# Altium PCB Doublewide.PcbDoc (part 1 of 2)
Units mm, origin at the board's own origin, x right, y up, seen from the top; angles counter-clockwise.
Board outline 97.5 x 70 mm, 6 copper layers (Top (GND), L2-HS, L3-GND, L4-PWR, L5, Bot), stack 1.744 mm thick; 113 components, 172 nets, 522 pads, 114 vias.
Unrouted connection lines stored in the file: 204.
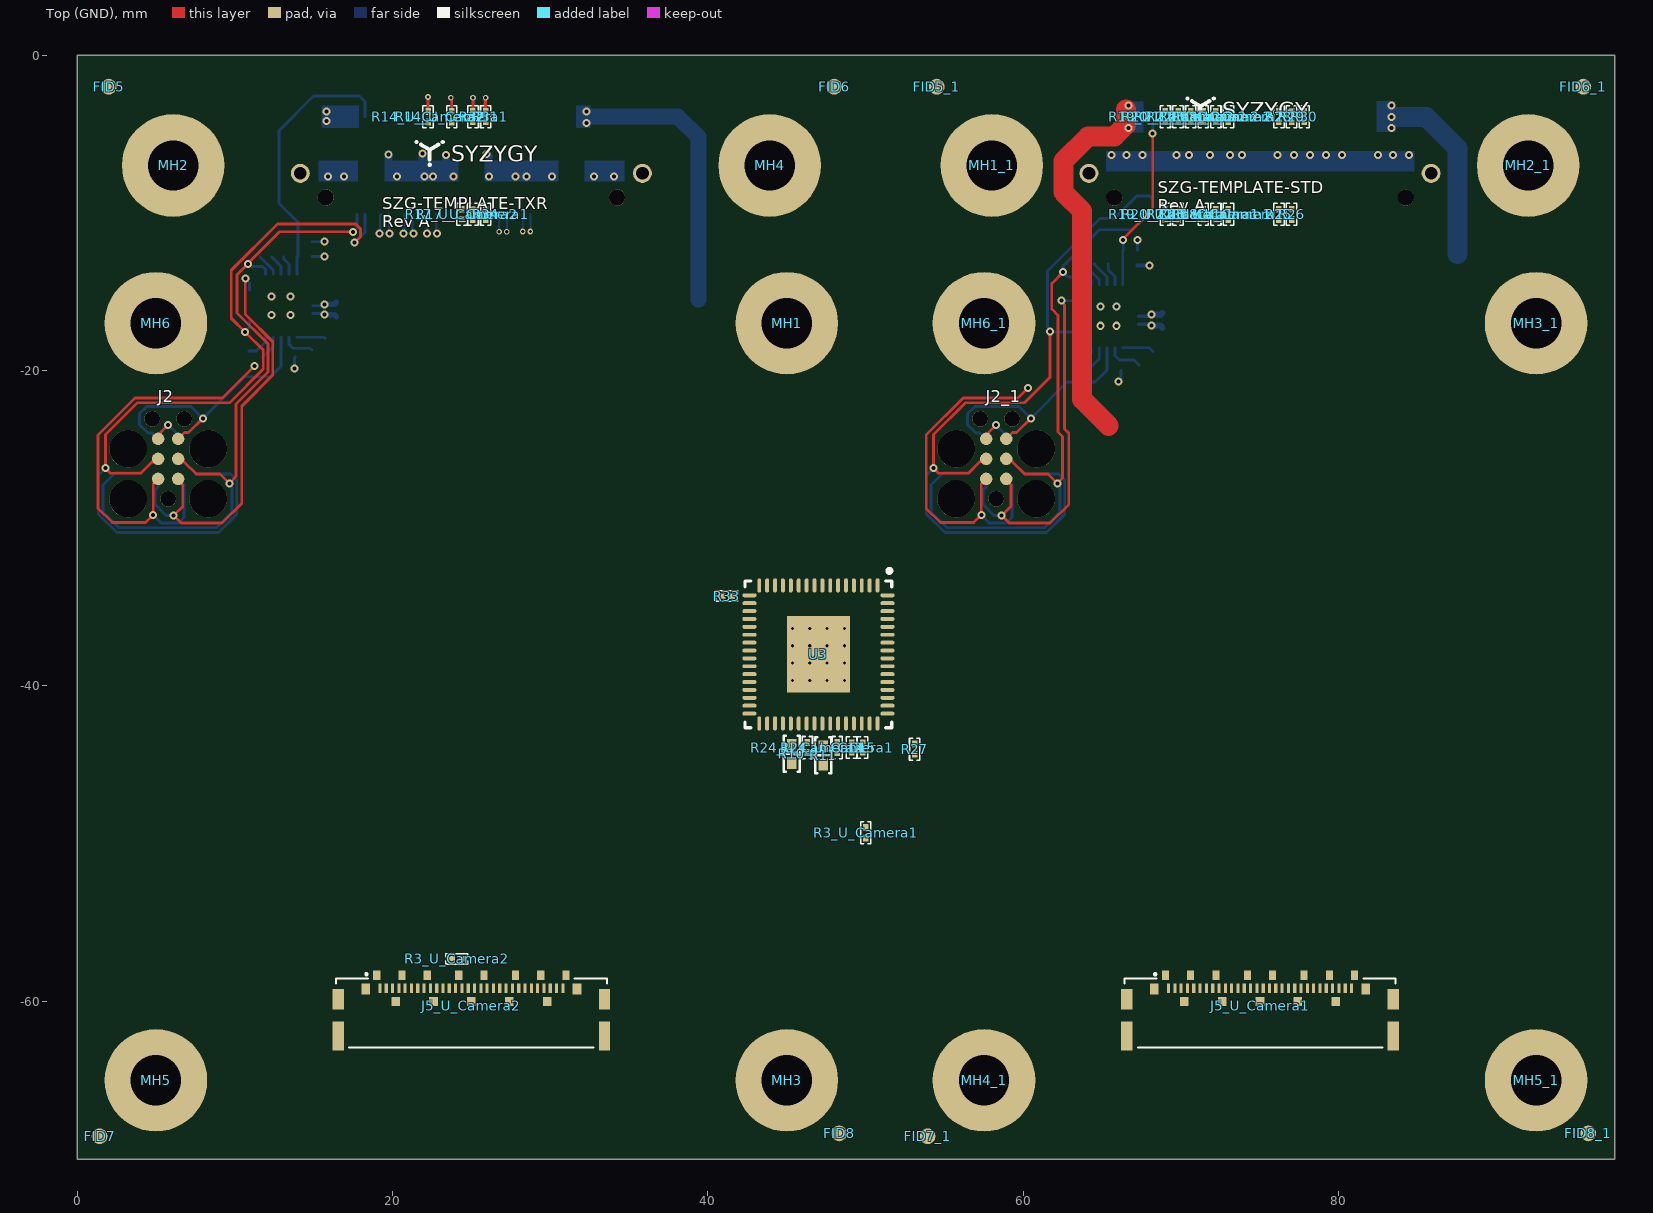
[diagram p0: Top (GND) view]
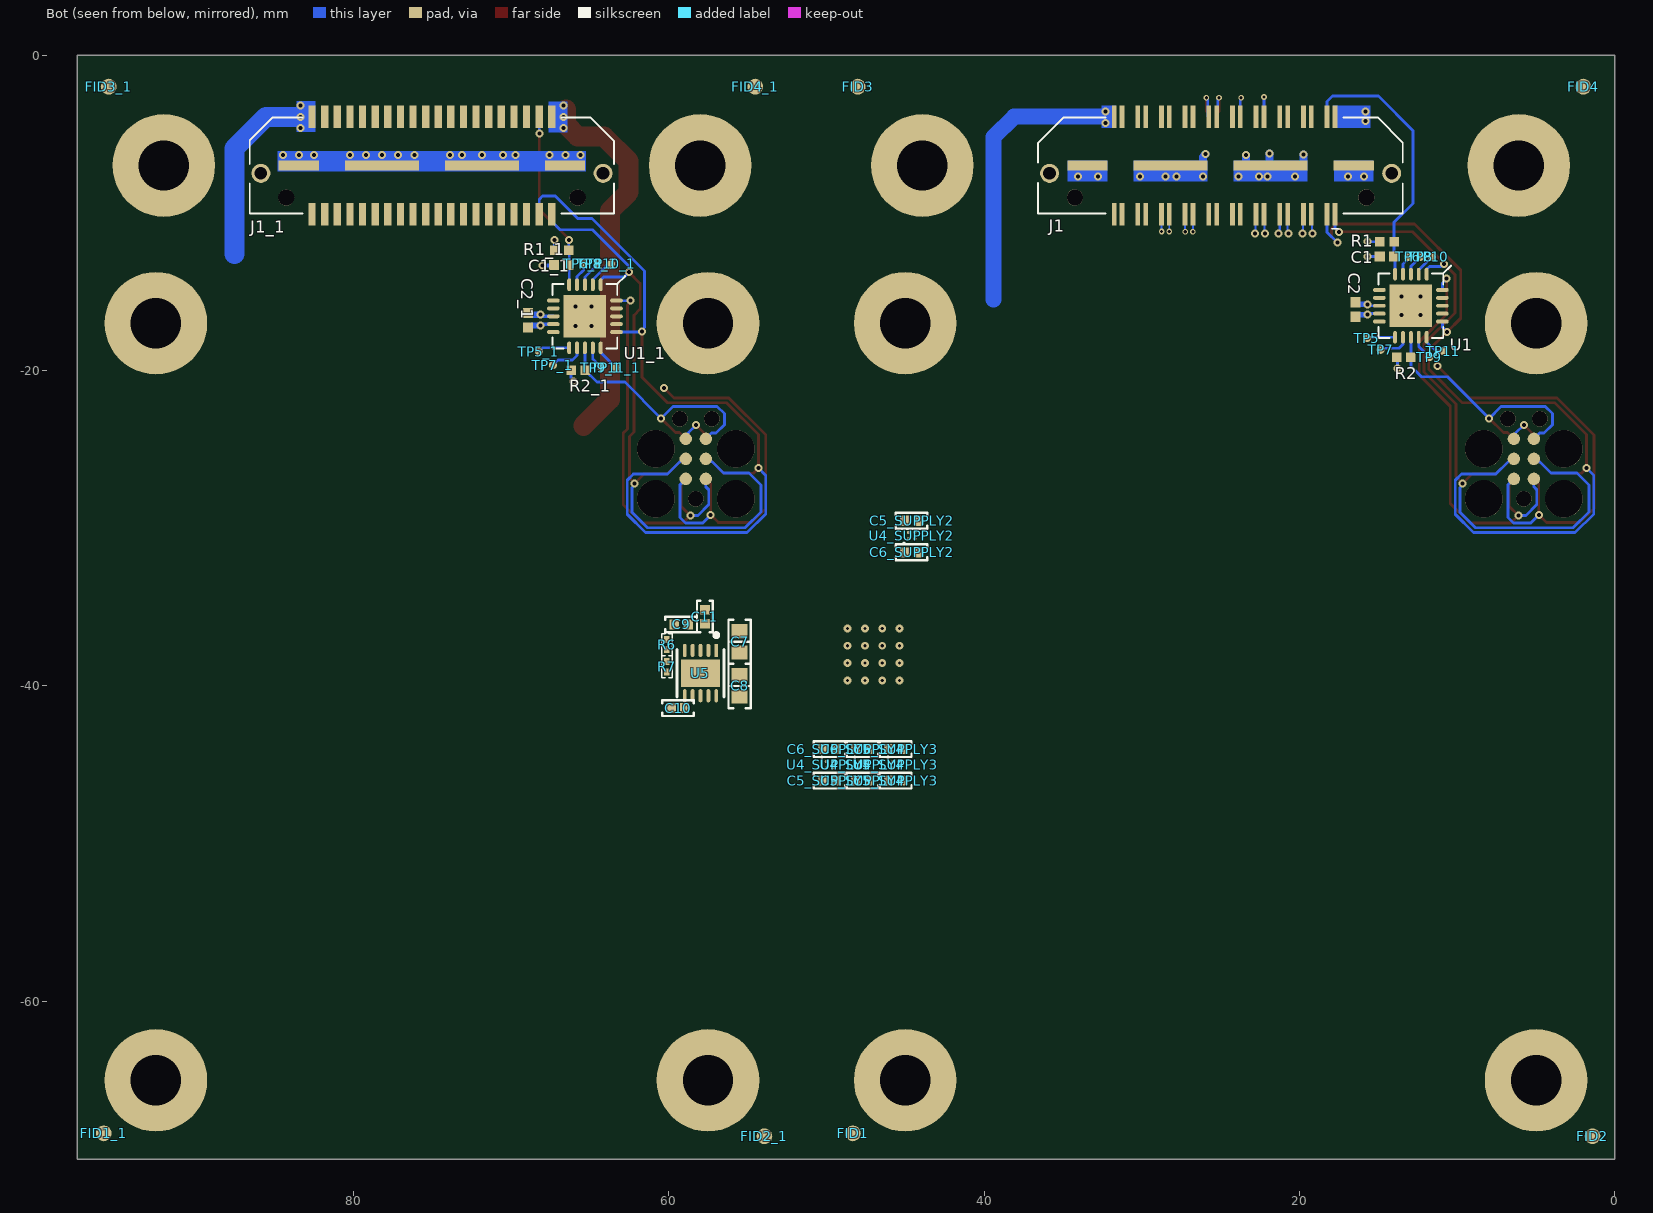
[diagram p1: Bot view, seen from below]
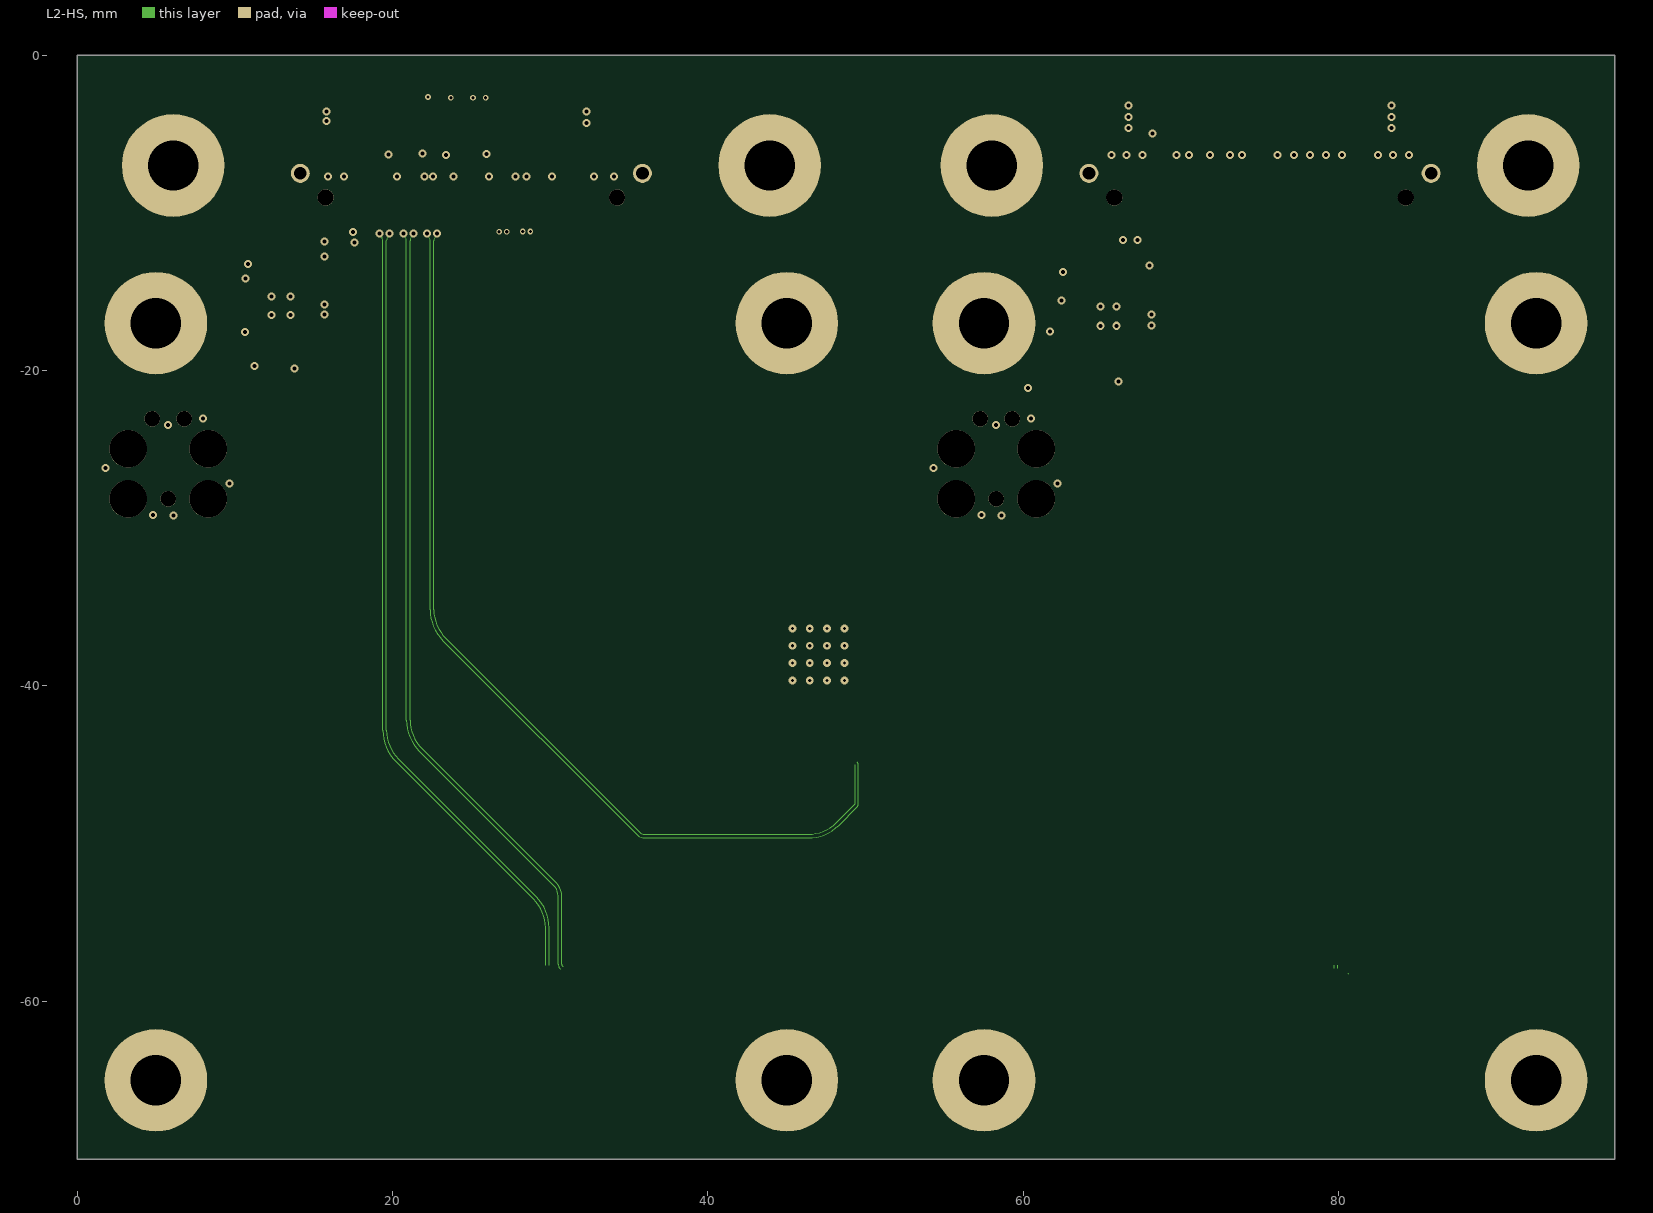
[diagram p2: L2-HS]
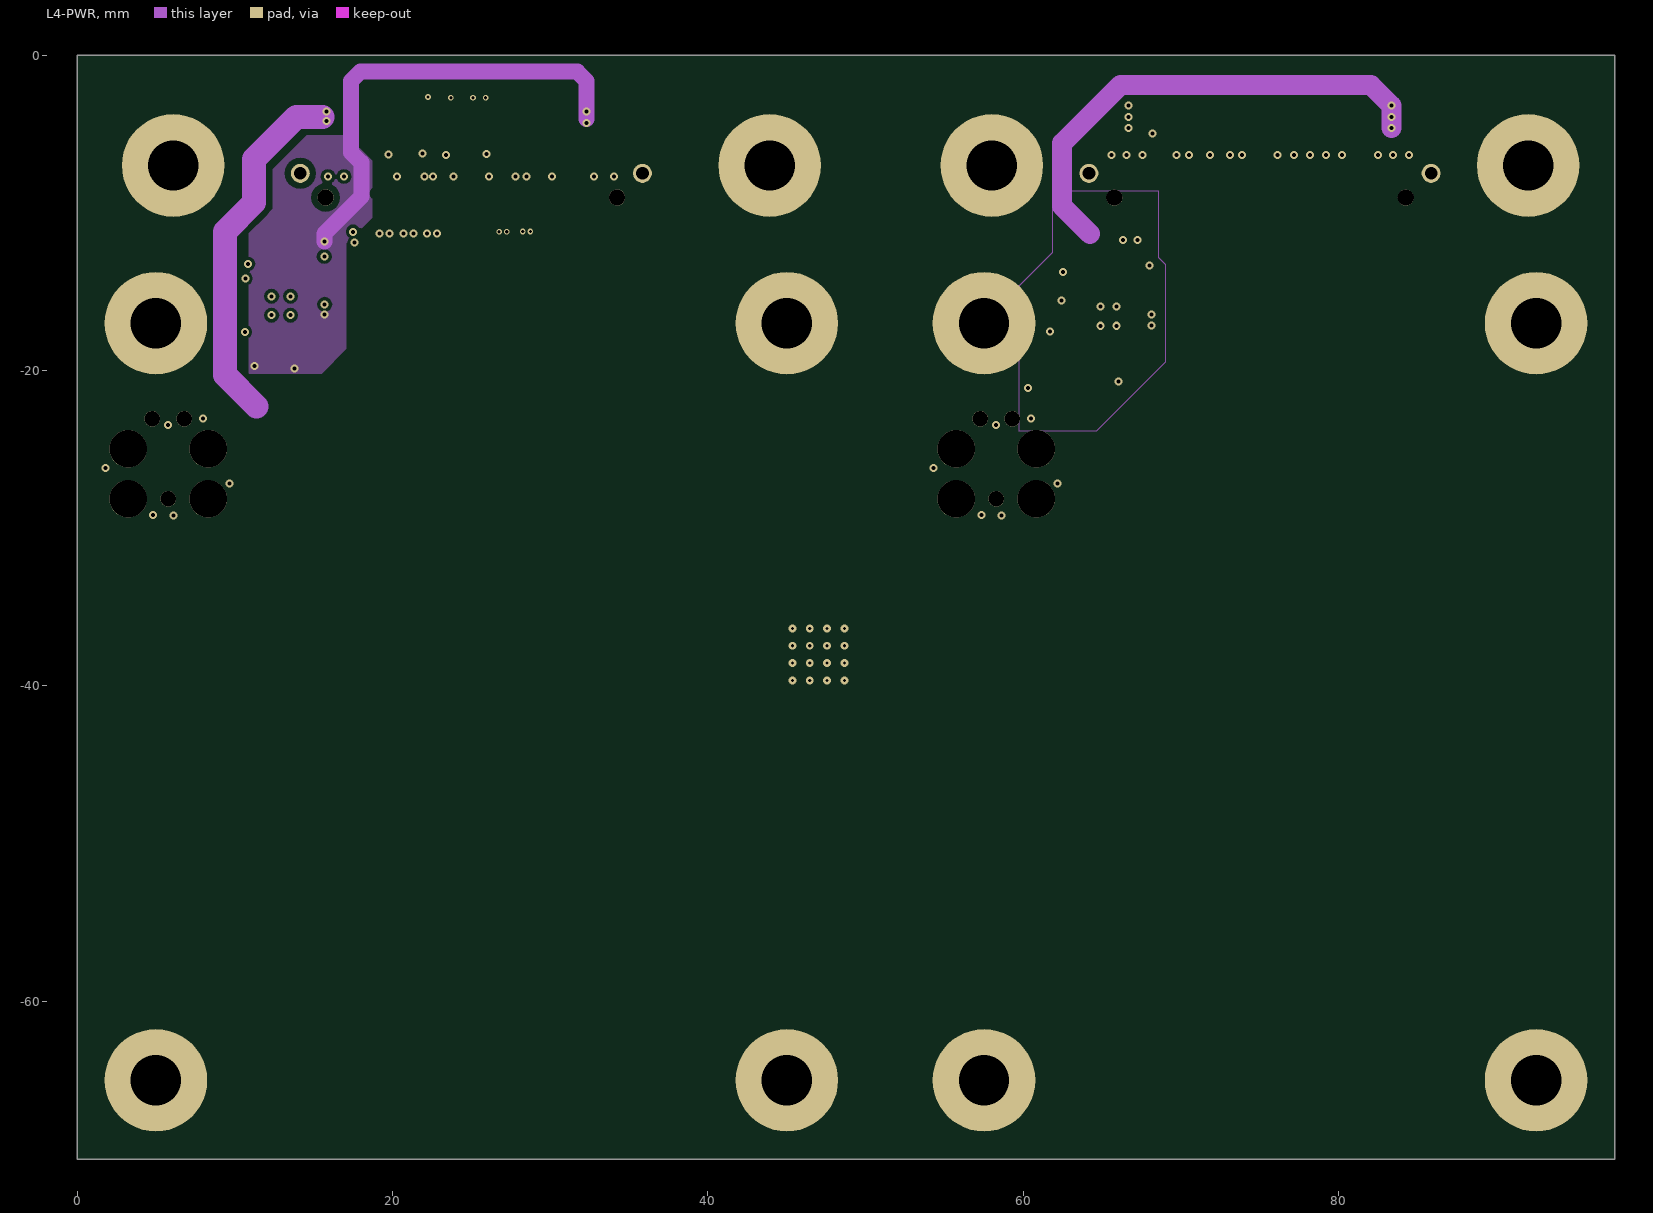
[diagram p3: L4-PWR]

## Layer stack, top to bottom
Top Solder: solder mask 0.02, Solder Resist, Dk 3.9
Top (GND): signal copper 0.035
Dielectric1-2: prepreg 0.112, IT180A, Dk 4.5
L2-HS: signal copper 0.015
Dielectric 1: prepreg 0.13, PP-006, Dk 4.9
L3-GND: signal copper 0.015
Dielectric2-3: core 1.13, IT180A, Dk 4.2
L4-PWR: signal copper 0.015
Dielectric3-4: prepreg 0.13, IT180A, Dk 4.9
L5: signal copper 0.015
Dielectric 2: prepreg 0.112, PP-006, Dk 4.5
Bot: signal copper 0.035
Bottom Solder: solder mask 0.02, Solder Resist, Dk 3.9

## Board outline
0,-70 97.5,-70 97.5,0 0,0

## Design rules (kind name [scope] priority, off if disabled: settings)
AssemblyTestPointUsage [All] p1 off:
AssemblyTestpoint [All] p1 off: testpointundercomponent=TRUE minsize=1.016 maxsize=2.54 preferedsize=1.524 minholesize=0 maxholesize=1.016 preferedholesize=0.813 testpointgrid=0.025 usegrid=TRUE gridtolerance=0 allowsidetop=TRUE allowsidebottom=TRUE
Clearance ClearanceFiducial [Name Like 'FID*'] p1: gap=1.27 ignorepadtopadclearanceinfootprint=FALSE except(0: Arc-Hole Track-Hole SMDPad-Hole THPad-Hole Via-Hole Fill-Hole Poly-Hole Region-Hole Text-Hole) // Fiducial clearance.
Clearance [All] p2: gap=0.127 ignorepadtopadclearanceinfootprint=FALSE except(0.203: Via-Fill Via-Poly Via-Region; 0.305: Poly-Region Region-Region; 0.381: Arc-Poly Track-Poly SMDPad-Poly THPad-Poly Fill-Poly Poly-Poly)
ComponentClearance [All] p1 off: gap=0.254 collisioncheckmode=3 verticalgap=0.254 showdistances=FALSE
DiffPairsRouting okDiffRouting100ohm [All] p1: maxlimit=0.16 minlimit=0.102 mostfreqgap=0.16 toplayer_mingap=0.16 toplayer_minwidth=0.119 toplayer_maxwidth=0.119 toplayer_prefwidth=0.119 midlayer2_mingap=0.16 midlayer2_minwidth=0.073 midlayer2_maxwidth=0.073 midlayer2_prefwidth=0.073 midlayer3_mingap=0.16 midlayer3_minwidth=0.072 midlayer3_maxwidth=0.072 midlayer3_prefwidth=0.072 bottomlayer_mingap=0.16 bottomlayer_minwidth=0.119 bottomlayer_maxwidth=0.119 bottomlayer_prefwidth=0.119 impedanceprofiledriven=TRUE impedanceprofileid={F71D47C0-FE2C-4818-BB52-536F50FC91E1} impedanceprofilevalue=100.000000 maxuncoupledlength=12.7 // Differential pair spacing for all 100ohm diff routes based on Gorilla Stackup.
FabricationTestPointUsage TestPointUsage [All] p1 off: valid=0 allowmultiple=FALSE
FabricationTestpoint Testpoint [All] p1: side=3 testpointundercomponent=TRUE minsize=0.508 maxsize=2.54 preferedsize=1.524 minholesize=0 maxholesize=1.016 preferedholesize=0.813 testpointgrid=0.025 allowsidetop=TRUE allowsidebottom=TRUE usegrid=TRUE gridtolerance=0.013
HoleSize [All] p1: absolutevalues=TRUE maxlimit=3.81 minlimit=0.254 maxpercent=80.000 minpercent=20.000
MatchedLengths Matched_SFP_DiffPair [InxSignalClass('xSignals_SFP')] p1: tolerance=0.254 checknetsindiffpair=TRUE checkdiffpairvsdiffpair=FALSE checkxsignals=FALSE checkothers=FALSE
MatchedLengths Matched_SFP1 [InxSignalClass('xSignals_SFP1')] p2: tolerance=4.699 checknetsindiffpair=FALSE checkdiffpairvsdiffpair=TRUE checkxsignals=TRUE checkothers=TRUE
MatchedLengths Matched_SFP2 [InxSignalClass('xSignals_SFP2')] p3: tolerance=4.699 checknetsindiffpair=FALSE checkdiffpairvsdiffpair=TRUE checkxsignals=TRUE checkothers=TRUE
MaximumViaCount okMaxViaDDR2Odt [InNetClass('okDDR2Data') Or InNetClass('okDDR2Masks') Or InNetClass('okDDR2Strobes')] p1: limit=2 // Set max via count of 2 for signals without external termination.
MaximumViaCount okMaxViaDDR2ExtTerm [InNetClass('okDDR2AddrCtrl') Or InNet('DRAM_C\K\') Or InNet('DRAM_CK')] p2: limit=3 // Set max via count of 3 for signals with external termination.
MinimumSolderMaskSliver [All] p1: minsoldermaskwidth=0.076
PlaneClearance [All] p1: clearance=0.279
PlaneConnect PlaneConnectNotVia [Not IsVia] p1: planeconnectstyle=Relief reliefexpansion=0.508 reliefentries=4 reliefconductorwidth=0.254 reliefairgap=0.254
PlaneConnect PlaneConnectVia [IsVia] p2: planeconnectstyle=Direct reliefexpansion=0.508 reliefentries=4 reliefconductorwidth=0.254 reliefairgap=0.254
PolygonConnect PolygonConnectVia [IsVia] p1: connectstyle=Direct reliefconductorwidth=0.203 reliefentries=4 polygonreliefangle="90 Angle" airgapwidth=0.254
PolygonConnect PolygonConnectNotVia [Not IsVia] p2: connectstyle=Relief reliefconductorwidth=0.254 reliefentries=4 polygonreliefangle="90 Angle" airgapwidth=0.254
RoomDefinition SUPPLY5 [InComponentClass('SUPPLY5')] p1: confinementstyle=ConfineIn formatcopy=TRUE lockcomponents=FALSE outline 48.46,-46.84 51.16,-46.84 51.16,-43.04 48.46,-43.04
RoomDefinition SUPPLY4 [InComponentClass('SUPPLY4')] p2: confinementstyle=ConfineIn formatcopy=TRUE lockcomponents=FALSE outline 46.36,-46.84 49.06,-46.84 49.06,-43.04 46.36,-43.04
RoomDefinition SUPPLY3 [InComponentClass('SUPPLY3')] p3: confinementstyle=ConfineIn formatcopy=TRUE lockcomponents=FALSE outline 44.26,-46.84 46.96,-46.84 46.96,-43.04 44.26,-43.04
RoomDefinition U_Clocking [InComponentClass('U_Clocking')] p4: confinementstyle=ConfineIn formatcopy=TRUE lockcomponents=FALSE outline -42.8,-143.2 8,-143.2 8,-117.8 -42.8,-117.8
RoomDefinition U_Camera2 [InComponentClass('U_Camera2')] p5: confinementstyle=ConfineIn formatcopy=TRUE lockcomponents=FALSE outline -42.8,-143.2 8,-143.2 8,-117.8 -42.8,-117.8
RoomDefinition U_Camera1 [InComponentClass('U_Camera1')] p6: confinementstyle=ConfineIn formatcopy=TRUE lockcomponents=FALSE outline -42.8,-143.2 8,-143.2 8,-117.8 -42.8,-117.8
RoomDefinition TXR [InComponentClass('TXR')] p7: confinementstyle=ConfineIn formatcopy=TRUE lockcomponents=FALSE outline -42.8,-143.2 8,-143.2 8,-117.8 -42.8,-117.8
RoomDefinition STD [InComponentClass('STD')] p8: confinementstyle=ConfineIn formatcopy=TRUE lockcomponents=FALSE outline -42.8,-143.2 8,-143.2 8,-117.8 -42.8,-117.8
RoomDefinition Main [InComponentClass('Main')] p9: confinementstyle=ConfineIn formatcopy=TRUE lockcomponents=FALSE outline -42.8,-143.2 8,-143.2 8,-117.8 -42.8,-117.8
RoomDefinition SUPPLY2 [InComponentClass('SUPPLY2')] p10: confinementstyle=ConfineIn formatcopy=TRUE lockcomponents=FALSE outline 45.931,-28.625 43.231,-28.625 43.231,-32.425 45.931,-32.425
RoomDefinition SUPPLY1 [InComponentClass('SUPPLY1')] p11: confinementstyle=ConfineIn formatcopy=TRUE lockcomponents=FALSE outline 60.8,-42.3 60.8,-34.2 54.4,-34.2 54.4,-42.3
RoutingVias [All] p1: holewidth=0.203 width=0.356 viastyle="Through Hole" minholewidth=0.203 minwidth=0.356 maxholewidth=1.016 maxwidth=1.524
SilkToSilkClearance [All] p1: silktosilkclearance=0.003
SilkToSolderMaskClearance SilkscreenOverComponentPads [IsPad] p1: minsilkscreentomaskgap=0.025 clearancetoexposedcopper=FALSE
SolderMaskExpansion [All] p1: expansion=0.051 istentingtop=FALSE
Width okWidthPower [InNetClass('okPower')] p1: maxlimit=2.54 minlimit=0.127 preferedwidth=0.406 midlayer2_prefwidth=0.356 midlayer3_prefwidth=0.356 midlayer4_prefwidth=0.356 minimp=50.000000 maximp=50.000000 favimp=50.000000
Width [All] p2: maxlimit=2.54 minlimit=0.076 preferedwidth=0.127 toplayer_minwidth=0.172 toplayer_maxwidth=0.172 toplayer_prefwidth=0.172 midlayer2_minwidth=0.087 midlayer2_maxwidth=0.087 midlayer2_prefwidth=0.087 midlayer3_minwidth=0.086 midlayer3_maxwidth=0.086 midlayer3_prefwidth=0.086 bottomlayer_minwidth=0.172 bottomlayer_maxwidth=0.172 bottomlayer_prefwidth=0.172 impedanceprofiledriven=TRUE impedanceprofileid={7163903A-9011-4922-82E0-F8AB0241B194} impedanceprofilevalue=50.000000 minimp=50.000000 maximp=50.000000 favimp=50.000000 // Non-Controlled routes
18 further rules are at their usual default settings.

## Classes and differential pairs
channel class ADP151-1V8: SUPPLY2 SUPPLY3 SUPPLY4 SUPPLY5
component class SUPPLY5: C5_SUPPLY5 C6_SUPPLY5 U4_SUPPLY5
component class SUPPLY4: C5_SUPPLY4 C6_SUPPLY4 U4_SUPPLY4
component class SUPPLY3: C5_SUPPLY3 C6_SUPPLY3 U4_SUPPLY3
component class SUPPLY2: C5_SUPPLY2 C6_SUPPLY2 U4_SUPPLY2
component class SUPPLY1: C7 C8 C9 C10 C11 R6 R7 U5
channel class Camera: U_Camera1 U_Camera2
component class TXR: C1 C2 FID1 FID2 FID3 FID4 FID5 FID6 FID7 FID8 J1 J2 MH1 MH2 MH3 MH4 MH5 MH6 R1 R2 TP5 TP6 TP7 TP8 TP9 TP10 TP11 U1
component class U_Clocking: U3
component class U_Camera2: J5_U_Camera2 R3_U_Camera2 R14_U_Camera2 R17_U_Camera2 R18_U_Camera2 R19_U_Camera2 R20_U_Camera2 R21_U_Camera2 R22_U_Camera2 R23_U_Camera2 R24_U_Camera2
component class U_Camera1: J5_U_Camera1 R3_U_Camera1 R14_U_Camera1 R17_U_Camera1 R18_U_Camera1 R19_U_Camera1 R20_U_Camera1 R21_U_Camera1 R22_U_Camera1 R23_U_Camera1 R24_U_Camera1
component class Main: C14 C15 R10 R11 R25 R26 R27 R28 R29 R30 R31 R32 R33 R34
component class STD: C1_1 C2_1 FID1_1 FID2_1 FID3_1 FID4_1 FID5_1 FID6_1 FID7_1 FID8_1 J1_1 J2_1 MH1_1 MH2_1 MH3_1 MH4_1 MH5_1 MH6_1 R1_1 R2_1 TP5_1 TP6_1 TP7_1 TP8_1 TP9_1 TP10_1 TP11_1 U1_1
net class okPower: +3.3V VIO
differential pair DP_RX2: +RX2_P -RX2_N
differential pair DP_TX2: +TX2P -TX2N
differential pair DP_TX1: +TX1P -TX1N
differential pair DP_TX0: +TX0P -TX0N
differential pair DP_TX3: +TX3P -TX3N
differential pair DP_RX3: +RX3_P -RX3_N
differential pair DP_RX1: +RX1_P -RX1_N
differential pair DP_RX0: +RX0_P -RX0_N
differential pair DP_P2C_CLK: +P2C_CLKP_1 -P2C_CLKN_1
differential pair DP_C2P_CLK: +C2P_CLKP_1 -C2P_CLKN_1
differential pair DP_REFCLK: +REFCLK_P -REFCLK_N

## Components (designator, comment, footprint, x,y, rotation, side; value= is the part's Value field where it differs from the comment)
C1 "C0402C104K8PACTU" CAPC1005X06N 14.453,-12.776 r180 bottom value="0.1 u"
C1_1 "C0402C104K8PACTU" CAPC1005X06N 66.8,-13.3 r180 bottom value="0.1 u"
C2 "C0402C104K8PACTU" CAPC1005X06N 16.436,-16.132 r270 bottom value="0.1 u"
C2_1 "C0402C104K8PACTU" CAPC1005X06N 68.9,-16.8 r270 bottom value="0.1 u"
C5_SUPPLY2 "4.7µF" "CAP 0402_1005" 44.591,-29.525 r0 bottom (schematic designator C5)
C5_SUPPLY3 "4.7µF" "CAP 0402_1005" 45.6,-46 r180 bottom (schematic designator C5)
C5_SUPPLY4 "4.7µF" "CAP 0402_1005" 47.7,-46 r0 bottom (schematic designator C5)
C5_SUPPLY5 "4.7µF" "CAP 0402_1005" 49.8,-46 r0 bottom (schematic designator C5)
C6_SUPPLY2 "4.7µF" "CAP 0402_1005" 44.591,-31.525 r0 bottom (schematic designator C6)
C6_SUPPLY3 "4.7µF" "CAP 0402_1005" 45.6,-44 r0 bottom (schematic designator C6)
C6_SUPPLY4 "4.7µF" "CAP 0402_1005" 47.7,-44 r0 bottom (schematic designator C6)
C6_SUPPLY5 "4.7µF" "CAP 0402_1005" 49.8,-44 r0 bottom (schematic designator C6)
C7 "47 µF" "CAP 0603_1608" 55.5,-37.2 r270 bottom
C8 "47 µF" "CAP 0603_1608" 55.5,-40 r90 bottom
C9 "4.7µF" "CAP 0402_1005" 59.2,-36.1 r180 bottom
C10 "4.7µF" "CAP 0402_1005" 59.4,-41.4 r180 bottom
C11 "4.7µF" "CAP 0402_1005" 57.7,-35.6 r90 bottom
C14 "10000pF" "CAP 0201_0603" 49.1,-43.9 r270 top
C15 "10000pF" "CAP 0201_0603" 49.8,-43.9 r270 top
FID1 "FIDUCIAL" FID1MM/2MM-SS 48.312,-68.365 r90 bottom
FID1_1 "FIDUCIAL" FID1MM/2MM-SS 95.812,-68.365 r90 bottom
FID2 "FIDUCIAL" FID1MM/2MM-SS 1.422,-68.551 r90 bottom
FID2_1 "FIDUCIAL" FID1MM/2MM-SS 53.922,-68.551 r90 bottom
FID3 "FIDUCIAL" FID1MM/2MM-SS 48,-2 r90 bottom
FID3_1 "FIDUCIAL" FID1MM/2MM-SS 95.5,-2 r90 bottom
FID4 "FIDUCIAL" FID1MM/2MM-SS 2,-2 r90 bottom
FID4_1 "FIDUCIAL" FID1MM/2MM-SS 54.5,-2 r90 bottom
FID5 "FIDUCIAL" FID1MM/2MM-SS 2,-2 r90 top
FID5_1 "FIDUCIAL" FID1MM/2MM-SS 54.5,-2 r90 top
FID6 "FIDUCIAL" FID1MM/2MM-SS 48,-2 r90 top
FID6_1 "FIDUCIAL" FID1MM/2MM-SS 95.5,-2 r90 top
FID7 "FIDUCIAL" FID1MM/2MM-SS 1.422,-68.551 r90 top
FID7_1 "FIDUCIAL" FID1MM/2MM-SS 53.922,-68.551 r90 top
FID8 "FIDUCIAL" FID1MM/2MM-SS 48.312,-68.365 r90 top
FID8_1 "FIDUCIAL" FID1MM/2MM-SS 95.812,-68.365 r90 top
J1 "40-pin, ground protection in middle" QTH-020-01-X-D-DP-A-L 25,-7 r0 bottom locked
J1_1 "QTE-020-01-F-D-A" QTE-020-01-X-D-A-L 75,-7 r0 bottom
J2 "" TC2030-DUAL 5.775,-28.14 r90 top
J2_1 "" TC2030-DUAL 58.275,-28.14 r90 top
J5_U_Camera1 "20682-030E-02" IPEX_20682-030E-02 75,-59.175 r0 top (schematic designator J5)
J5_U_Camera2 "20682-030E-02" IPEX_20682-030E-02 25,-59.175 r0 top (schematic designator J5)
MH1 "MTG" MTG-3.2/6.5-PTH 45,-17 r0 top locked
MH1_1 "MTG" MTG-3.2/6.5-PTH 58,-7 r0 top locked
MH2 "MTG" MTG-3.2/6.5-PTH 6.09,-7 r0 top locked
MH2_1 "MTG" MTG-3.2/6.5-PTH 92,-7 r0 top locked
MH3 "MTG" MTG-3.2/6.5-PTH 45,-65 r0 top locked
MH3_1 "MTG" MTG-3.2/6.5-PTH 92.5,-17 r0 top locked
MH4 "MTG" MTG-3.2/6.5-PTH 43.91,-7 r0 top locked
MH4_1 "MTG" MTG-3.2/6.5-PTH 57.5,-65 r0 top locked
MH5 "MTG" MTG-3.2/6.5-PTH 5,-65 r0 top locked
MH5_1 "MTG" MTG-3.2/6.5-PTH 92.5,-65 r0 top locked
MH6 "MTG" MTG-3.2/6.5-PTH 5,-17 r0 top locked
MH6_1 "MTG" MTG-3.2/6.5-PTH 57.5,-17 r0 top locked
R1 "CRCW040210K0FKED" RESC1005X06N 14.453,-11.83 r0 bottom value="10.0 k"
R1_1 "CRCW040210K0FKED" RESC1005X06N 66.775,-12.37 r0 bottom value="10.0 k"
R2 "CRCW040210K0FKED" RESC1005X06N 13.386,-19.145 r0 bottom value="10.0 k"
R2_1 "CRCW040210K0FKED" RESC1005X06N 65.733,-19.99 r0 bottom value="10.0 k"
R3_U_Camera1 "10 kOhms" "RES 0201_0603" 50,-49.3 r270 top (schematic designator R3)
R3_U_Camera2 "10 kOhms" "RES 0201_0603" 24.075,-57.3 r180 top (schematic designator R3)
R6 "150 kOhms" "RES 0201_0603" 60.1,-37.375 r270 bottom
R7 "301 kOhms" "RES 0201_0603" 60.1,-38.775 r270 bottom
R10 "49.9 Ohms" "RES 0402_1005" 45.3,-44.3 r90 top
R11 "49.9 Ohms" "RES 0402_1005" 47.3,-44.4 r90 top
R14_U_Camera1 "10 Ohms" "RES 0201_0603" 23.75,-3.91 r270 top (schematic designator R14)
R14_U_Camera2 "10 Ohms" "RES 0201_0603" 22.25,-3.91 r270 top (schematic designator R14)
R17_U_Camera1 "10 Ohms" "RES 0201_0603" 25.1,-10.1 r270 top (schematic designator R17)
R17_U_Camera2 "10 Ohms" "RES 0201_0603" 24.4,-10.1 r270 top (schematic designator R17)
R18_U_Camera1 "10 Ohms" "RES 0201_0603" 73,-10.1 r270 top (schematic designator R18)
R18_U_Camera2 "10 Ohms" "RES 0201_0603" 73,-3.9 r270 top (schematic designator R18)
R19_U_Camera1 "10 Ohms" "RES 0201_0603" 69,-10.1 r270 top (schematic designator R19)
R19_U_Camera2 "10 Ohms" "RES 0201_0603" 69,-3.9 r270 top (schematic designator R19)
R20_U_Camera1 "10 Ohms" "RES 0201_0603" 69.8,-10.1 r270 top (schematic designator R20)
R20_U_Camera2 "10 Ohms" "RES 0201_0603" 69.8,-3.9 r270 top (schematic designator R20)
R21_U_Camera1 "10 Ohms" "RES 0201_0603" 71.4,-10.1 r270 top (schematic designator R21)
R21_U_Camera2 "10 Ohms" "RES 0201_0603" 70.6,-3.9 r270 top (schematic designator R21)
R22_U_Camera1 "10 Ohms" "RES 0201_0603" 71.4,-10.1 r270 top (schematic designator R22)
R22_U_Camera2 "10 Ohms" "RES 0201_0603" 71.4,-3.9 r270 top (schematic designator R22)
R23_U_Camera1 "10 Ohms" "RES 0201_0603" 72.2,-10.1 r270 top (schematic designator R23)
R23_U_Camera2 "10 Ohms" "RES 0201_0603" 72.2,-3.9 r270 top (schematic designator R23)
R24_U_Camera1 "10 Ohms" "RES 0201_0603" 48.2,-43.9 r270 top (schematic designator R24)
R24_U_Camera2 "10 Ohms" "RES 0201_0603" 46.3,-43.9 r270 top (schematic designator R24)
R25 "10 Ohms" "RES 0201_0603" 76.2,-10.1 r270 top
R26 "10 Ohms" "RES 0201_0603" 77,-10.1 r270 top
R27 "10 Ohms" "RES 0201_0603" 53.1,-44 r270 top
R28 "10 Ohms" "RES 0201_0603" 76.2,-3.9 r270 top
R29 "10 Ohms" "RES 0201_0603" 77,-3.9 r270 top
R30 "10 Ohms" "RES 0201_0603" 77.8,-3.9 r270 top
R31 "10 Ohms" "RES 0201_0603" 25.9,-3.9 r270 top
R32 "10 Ohms" "RES 0201_0603" 25.1,-3.9 r270 top
R33 "10 Ohms" "RES 0201_0603" 41.2,-34.3 r0 top
R34 "10 Ohms" "RES 0201_0603" 25.9,-10.1 r270 top
TP5 "TESTPOINT-SMD20" TP-SMD20 15.723,-17.951 r90 bottom
TP5_1 "TESTPOINT-SMD20" TP-SMD20 68.223,-18.796 r90 bottom
TP6 "TESTPOINT-SMD20" TP-SMD20 13.106,-12.795 r90 bottom
TP6_1 "TESTPOINT-SMD20" TP-SMD20 65.378,-13.233 r90 bottom
TP7 "TESTPOINT-SMD20" TP-SMD20 14.859,-18.688 r90 bottom
TP7_1 "TESTPOINT-SMD20" TP-SMD20 67.334,-19.66 r90 bottom
TP8 "TESTPOINT-SMD20" TP-SMD20 12.344,-12.795 r90 bottom
TP8_1 "TESTPOINT-SMD20" TP-SMD20 64.514,-13.233 r90 bottom
TP9 "TESTPOINT-SMD20" TP-SMD20 11.76,-19.145 r90 bottom
TP9_1 "TESTPOINT-SMD20" TP-SMD20 64.26,-19.812 r90 bottom
TP10 "TESTPOINT-SMD20" TP-SMD20 11.608,-12.795 r90 bottom
TP10_1 "TESTPOINT-SMD20" TP-SMD20 63.651,-13.233 r90 bottom
TP11 "TESTPOINT-SMD20" TP-SMD20 10.897,-18.764 r90 bottom
TP11_1 "TESTPOINT-SMD20" TP-SMD20 63.346,-19.812 r90 bottom
U1 "ATTINY44A-MU" QFN-EP-20 12.937,-15.892 r270 bottom
U1_1 "ATTINY44A-MU" QFN-EP-20 65.302,-16.561 r270 bottom
U3 "SiT95141AI-B00116" QFN50P900X900X90_HS-65N 47,-38 r270 top
U4_SUPPLY2 "ADP151ACBZ-1.8-R7" ADI-CB-4-3 44.591,-30.465 r90 bottom (schematic designator U4)
U4_SUPPLY3 "ADP151ACBZ-1.8-R7" ADI-CB-4-3 45.6,-45 r180 bottom (schematic designator U4)
U4_SUPPLY4 "ADP151ACBZ-1.8-R7" ADI-CB-4-3 47.7,-45 r180 bottom (schematic designator U4)
U4_SUPPLY5 "ADP151ACBZ-1.8-R7" ADI-CB-4-3 49.8,-45 r180 bottom (schematic designator U4)
U5 "ADP7157ACPZ-04-R7" FP-CP-10-9-IPC_B 57.975,-39.181 r270 bottom

## Footprints (in the part's own frame and the unit in brackets; to place one, negate y for a bottom-side part, rotate by r counter-clockwise, add the part's x,y. Pads: shape width x height; smd on the part's side, far side on the other; paste and mask are expansions set on the pad)
ADI-CB-4-3 [mm] "BGA, 4-Balls, Body 0.76x0.76mm, Pitch 0.4mm"
  round 0.2 smd: A1(-0.2,0.2) A2(0.2,0.2) B1(-0.2,-0.2) B2(0.2,-0.2)
  silkscreen extent -0.53,0.44 -0.44,0.54, body extent -0.38,-0.38 0.38,0.38, height 0.66
"CAP 0201_0603" [mm] "Chip Capacitor, 2-Leads, Body 0.60x0.30mm, IPC Medium Density"
  rect 0.4x0.35 smd: 1(-0.31,0) 2(0.31,0)
  silkscreen extent -0.67,-0.33 0.67,0.33, body extent -0.3,-0.15 0.3,0.15, height 0.3
"CAP 0402_1005" [mm] "Chip Capacitor, 2-Leads, Body 1.02x0.51mm, IPC Medium Density"
  rect 0.6x0.64 smd: 1(-0.44,0) 2(0.44,0)
  silkscreen extent -1,-0.5 1,0.5, body extent -0.5,-0.26 0.5,0.26, height 0.52
"CAP 0603_1608" [mm] "Chip Capacitor, 2-Leads, Body 1.60x0.80mm, IPC Medium Density"
  rect 0.9x1 smd: 1(-0.675,0) 2(0.675,0)
  silkscreen extent -1.4,-0.7 1.4,0.7, body extent -0.8,-0.41 0.8,0.41, height 0.82
CAPC1005X06N [mm] "Chip Capacitor, 2-Leads, Body 1.00x0.50mm, IPC Medium Density"
  rect 0.64x0.64 smd: 1(-0.46,0) 2(0.46,0)
  body extent -0.55,-0.3 0.55,0.3, height 0.6
FID1MM/2MM-SS [mm] "Fiducial 1mm copper, 2mm soldermask, single-side"
  round 1 smd paste-0.5 mask+0.5: FID?(0,0)
FP-CP-10-9-IPC_B [mm]
  rect 0.836x0.242 smd paste+0 mask+0: 1(-1.438,1)
  rrect100% 0.836x0.242 smd paste+0 mask+0: 2(-1.438,0.5) 3(-1.438,0) 4(-1.438,-0.5) 5(-1.438,-1) 6(1.438,-1) 7(1.438,-0.5) 8(1.438,0) 9(1.438,0.5) 10(1.438,1)
  rect 1.74x2.48 smd paste-1000 mask+0: 11(0,0)
  silkscreen extent -2.53,-1.5 1.5,1.5, body extent -1.5,-1.5 1.5,1.5, height 0.8
IPEX_20682-030E-02 [mm]
  rect 0.2x0.6 smd: 1(-5.8,0) 2(-5.4,0) 3(-5,0) 4(-4.6,0) 5(-4.2,0) 6(-3.8,0) 7(-3.4,0) 8(-3,0) 9(-2.6,0) 10(-2.2,0) 11(-1.8,0) 12(-1.4,0) 13(-1,0) 14(-0.6,0) 15(-0.2,0) 16(0.2,0) 17(0.6,0) 18(1,0) 19(1.4,0) 20(1.8,0) 21(2.2,0) 22(2.6,0) 23(3,0) 24(3.4,0) 25(3.8,0) 26(4.2,0) 27(4.6,0) 28(5,0) 29(5.4,0) 30(5.8,0)
  rect 0.71x1.3 smd: S1(-8.445,-0.7) S2(8.445,-0.7)
  rect 0.71x1.85 smd: S3(-8.445,-3.025) S4(8.445,-3.025)
  rect 0.55x0.55 smd: S5(-4.8,-0.825) S6(-2.4,-0.825) S7(0,-0.825) S14(2.4,-0.825) S15(4.8,-0.825)
  rect 0.45x0.58 smd: S8(-6,0.84) S9(-4.4,0.84) S10(-2.8,0.84) S11(-0.8,0.84) S16(0.8,0.84) S17(2.8,0.84) S18(6,0.84) S19(4.4,0.84)
  rect 0.55x0.7 smd: S12(-6.7,-0.05) S13(6.7,-0.05)
  silkscreen extent -8.6,-3.75 8.6,0.97
MTG-3.2/6.5-PTH [mm] "Mounting hole, 3.2mm ID, 6.5mm OD, plated"
  round 6.5 hole 3.2: 1(0,0)
QFN50P900X900X90_HS-65N [mm] "QFN, 64-Leads, Body 9.00x9.00mm, Pitch 0.50mm, Thermal Pad 4.85x4.00mm, IPC Medium Density"
  oval 0.9x0.25 smd mask+0.05: 1(-4.375,3.75) 2(-4.375,3.25) 3(-4.375,2.75) 4(-4.375,2.25) 5(-4.375,1.75) 6(-4.375,1.25) 7(-4.375,0.75) 8(-4.375,0.25) 9(-4.375,-0.25) 10(-4.375,-0.75) 11(-4.375,-1.25) 12(-4.375,-1.75) 13(-4.375,-2.25) 14(-4.375,-2.75) 15(-4.375,-3.25) 16(-4.375,-3.75) 33(4.375,-3.75) 34(4.375,-3.25) 35(4.375,-2.75) 36(4.375,-2.25) 37(4.375,-1.75) 38(4.375,-1.25) 39(4.375,-0.75) 40(4.375,-0.25) 41(4.375,0.25) 42(4.375,0.75) 43(4.375,1.25) 44(4.375,1.75) 45(4.375,2.25) 46(4.375,2.75) 47(4.375,3.25) 48(4.375,3.75)
  oval 0.25x0.9 smd mask+0.05: 17(-3.75,-4.375) 18(-3.25,-4.375) 19(-2.75,-4.375) 20(-2.25,-4.375) 21(-1.75,-4.375) 22(-1.25,-4.375) 23(-0.75,-4.375) 24(-0.25,-4.375) 25(0.25,-4.375) 26(0.75,-4.375) 27(1.25,-4.375) 28(1.75,-4.375) 29(2.25,-4.375) 30(2.75,-4.375) 31(3.25,-4.375) 32(3.75,-4.375) 49(3.75,4.375) 50(3.25,4.375) 51(2.75,4.375) 52(2.25,4.375) 53(1.75,4.375) 54(1.25,4.375) 55(0.75,4.375) 56(0.25,4.375) 57(-0.25,4.375) 58(-0.75,4.375) 59(-1.25,4.375) 60(-1.75,4.375) 61(-2.25,4.375) 62(-2.75,4.375) 63(-3.25,4.375) 64(-3.75,4.375)
  rect 4.85x4 smd mask+0.05: 65(0,0)
  silkscreen extent -5.42,-4.65 4.65,4.65, body extent -4.5,-4.5 4.5,4.5, height 0.9
QFN-EP-20 [mm]
  oval 0.8x0.25 smd mask+0.051: 1(-2,1) 2(-2,0.5) 3(-2,0) 4(-2,-0.5) 5(-2,-1) 11(2,-1) 12(2,-0.5) 13(2,0) 14(2,0.5) 15(2,1)
  oval 0.25x0.8 smd mask+0.051: 6(-1,-2) 7(-0.5,-2) 8(0,-2) 9(0.5,-2) 10(1,-2) 16(1,2) 17(0.5,2) 18(0,2) 19(-0.5,2) 20(-1,2)
  rect 2.7x2.7 smd paste-100 mask+0.051: PAD(0,0)
  silkscreen extent -2.55,-2.05 2.05,2.55
QTE-020-01-X-D-A-L [mm] "0.80mm, 40 pin Surface Mount connectors with Ground Strip"
  rect 2.54x0.64 smd paste+0: 0(-8.445,0) 0(8.445,0)
  rect 4.699x0.64 smd paste+0: 0(-3.175,0) 0(3.175,0)
  rect 0.46x1.45 smd paste+0: 1(-7.6,3.09) 2(-7.6,-3.09) 3(-6.8,3.09) 4(-6.8,-3.09) 5(-5.999,3.09) 6(-5.999,-3.09) 7(-5.199,3.09) 8(-5.199,-3.09) 9(-4.399,3.09) 10(-4.399,-3.09) 11(-3.599,3.09) 12(-3.599,-3.09) 13(-2.799,3.09) 14(-2.799,-3.09) 15(-1.999,3.09) 16(-1.999,-3.09) 17(-1.199,3.09) 18(-1.199,-3.09) 19(-0.399,3.09) 20(-0.399,-3.09) 21(0.401,3.09) 22(0.401,-3.09) 23(1.201,3.09) 24(1.201,-3.09) 25(2.002,3.09) 26(2.002,-3.09) 27(2.802,3.09) 28(2.802,-3.09) 29(3.602,3.09) 30(3.602,-3.09) 31(4.402,3.09) 32(4.402,-3.09) 33(5.202,3.09) 34(5.202,-3.09) 35(6.002,3.09) 36(6.002,-3.09) 37(6.802,3.09) 38(6.802,-3.09) 39(7.602,3.09) 40(7.602,-3.09)
  round 1.2 hole 0.8 paste+0: MH(-10.845,0.5) MH(10.845,0.5)
  round 1.02 hole 1.02 unplated paste+0: MH(-9.24,2.04) MH(9.24,2.04)
  silkscreen extent -11.55,-3.05 11.55,3.05
QTH-020-01-X-D-DP-A-L [mm] "0.5mm hi-speed, high-density header (female), 80-pin, latching, ground protection in middle"
  rect 2.54x0.64 smd mask+0.051: 0(-8.44,0) 0(8.44,0)
  rect 4.7x0.64 smd mask+0.051: 0(-3.17,0) 0(3.18,0)
  rect 0.3x1.45 smd mask+0.051: 1(-7.25,3.09) 2(-7.25,-3.09) 3(-6.75,3.09) 4(-6.75,-3.09) 5(-5.75,3.09) 6(-5.75,-3.09) 7(-5.25,3.09) 8(-5.25,-3.09) 9(-4.25,3.09) 10(-4.25,-3.09) 11(-3.75,3.09) 12(-3.75,-3.09) 13(-2.75,3.09) 14(-2.75,-3.09) 15(-2.25,3.09) 16(-2.25,-3.09) 17(-1.25,3.09) 18(-1.25,-3.09) 19(-0.75,3.09) 20(-0.75,-3.09) 21(0.25,3.09) 22(0.25,-3.09) 23(0.75,3.09) 24(0.75,-3.09) 25(1.75,3.09) 26(1.75,-3.09) 27(2.25,3.09) 28(2.25,-3.09) 29(3.25,3.09) 30(3.25,-3.09) 31(3.75,3.09) 32(3.75,-3.09) 33(4.75,3.09) 34(4.75,-3.09) 35(5.25,3.09) 36(5.25,-3.09) 37(6.25,3.09) 38(6.25,-3.09) 39(6.75,3.09) 40(6.75,-3.09)
  round 1.2 hole 0.8 paste+0: MH(-10.845,0.5) MH(10.845,0.5)
  round 1.02 hole 1.02 unplated paste+0: MH(-9.24,2.03) MH(9.24,2.03)
  silkscreen extent -11.55,-3.05 11.58,4.01
"RES 0201_0603" [mm] "Chip Resistor, 2-Leads, Body 0.60x0.30mm, IPC Medium Density"
  rect 0.44x0.35 smd: 1(-0.325,0) 2(0.325,0)
  silkscreen extent -0.7,-0.33 0.7,0.33, body extent -0.3,-0.15 0.3,0.15, height 0.21
"RES 0402_1005" [mm] "Chip Resistor, 2-Leads, Body 1.0x0.5mm, IPC Medium Density"
  rect 0.75x0.6 smd: 1(-0.575,0) 2(0.575,0)
  silkscreen extent -1.14,-0.51 1.14,0.51, body extent -0.5,-0.25 0.5,0.25, height 0.35
RESC1005X06N [mm] "Chip Resistor, 2-Leads, Body 1.00x0.50mm, IPC Medium Density"
  rect 0.6x0.6 smd: 1(-0.45,0) 2(0.45,0)
  body extent -0.55,-0.3 0.55,0.3, height 0.6
TC2030-DUAL [mil]
  round 31 smd paste-393.7: 1(50,-25) 2(50,25) 3(100,-25) 4(100,25) 5(150,-25) 6(150,25)
  round 31 smd far side paste-393.7: 1(50,25) 2(50,-25) 3(100,25) 4(100,-25) 5(150,25) 6(150,-25)
  round 39 hole 39 unplated: A(0,0) B(200,40) C(200,-40)
  round 93.5 hole 93.5 unplated: D(0,-100) E(125,-100) F(0,100) G(125,100)
TP-SMD20 [mil] "Test point, surface-mount, 20mil"
  round 20 smd paste-78.74: 1(0,0)